# Altium PCB SatController.PcbDoc
Units mil, origin at the board's own origin, x right, y up, seen from the top; angles counter-clockwise.
Board outline 2000 x 1700 mil, 2 copper layers (Top Layer, Bottom Layer); 25 components, 25 nets, 117 pads, 12 vias.
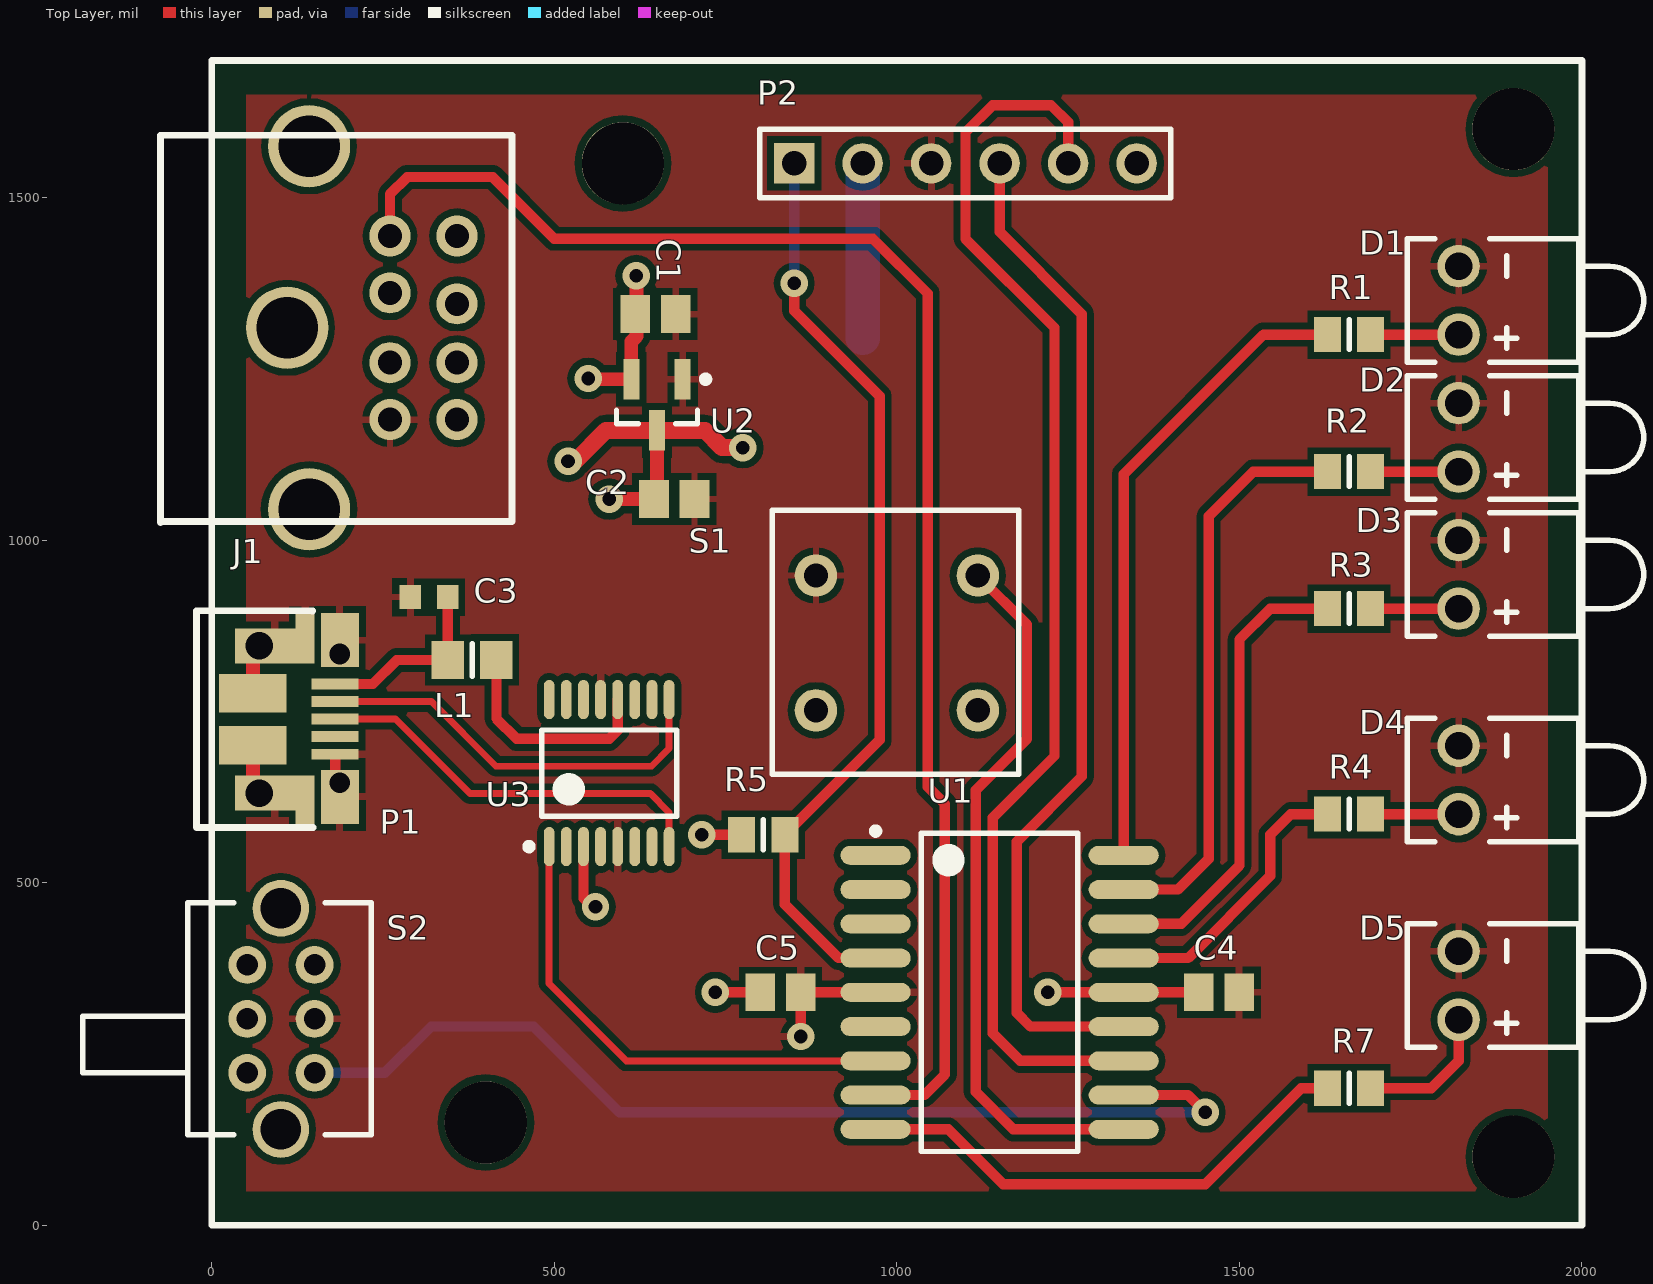
[diagram p0: Top Layer view]
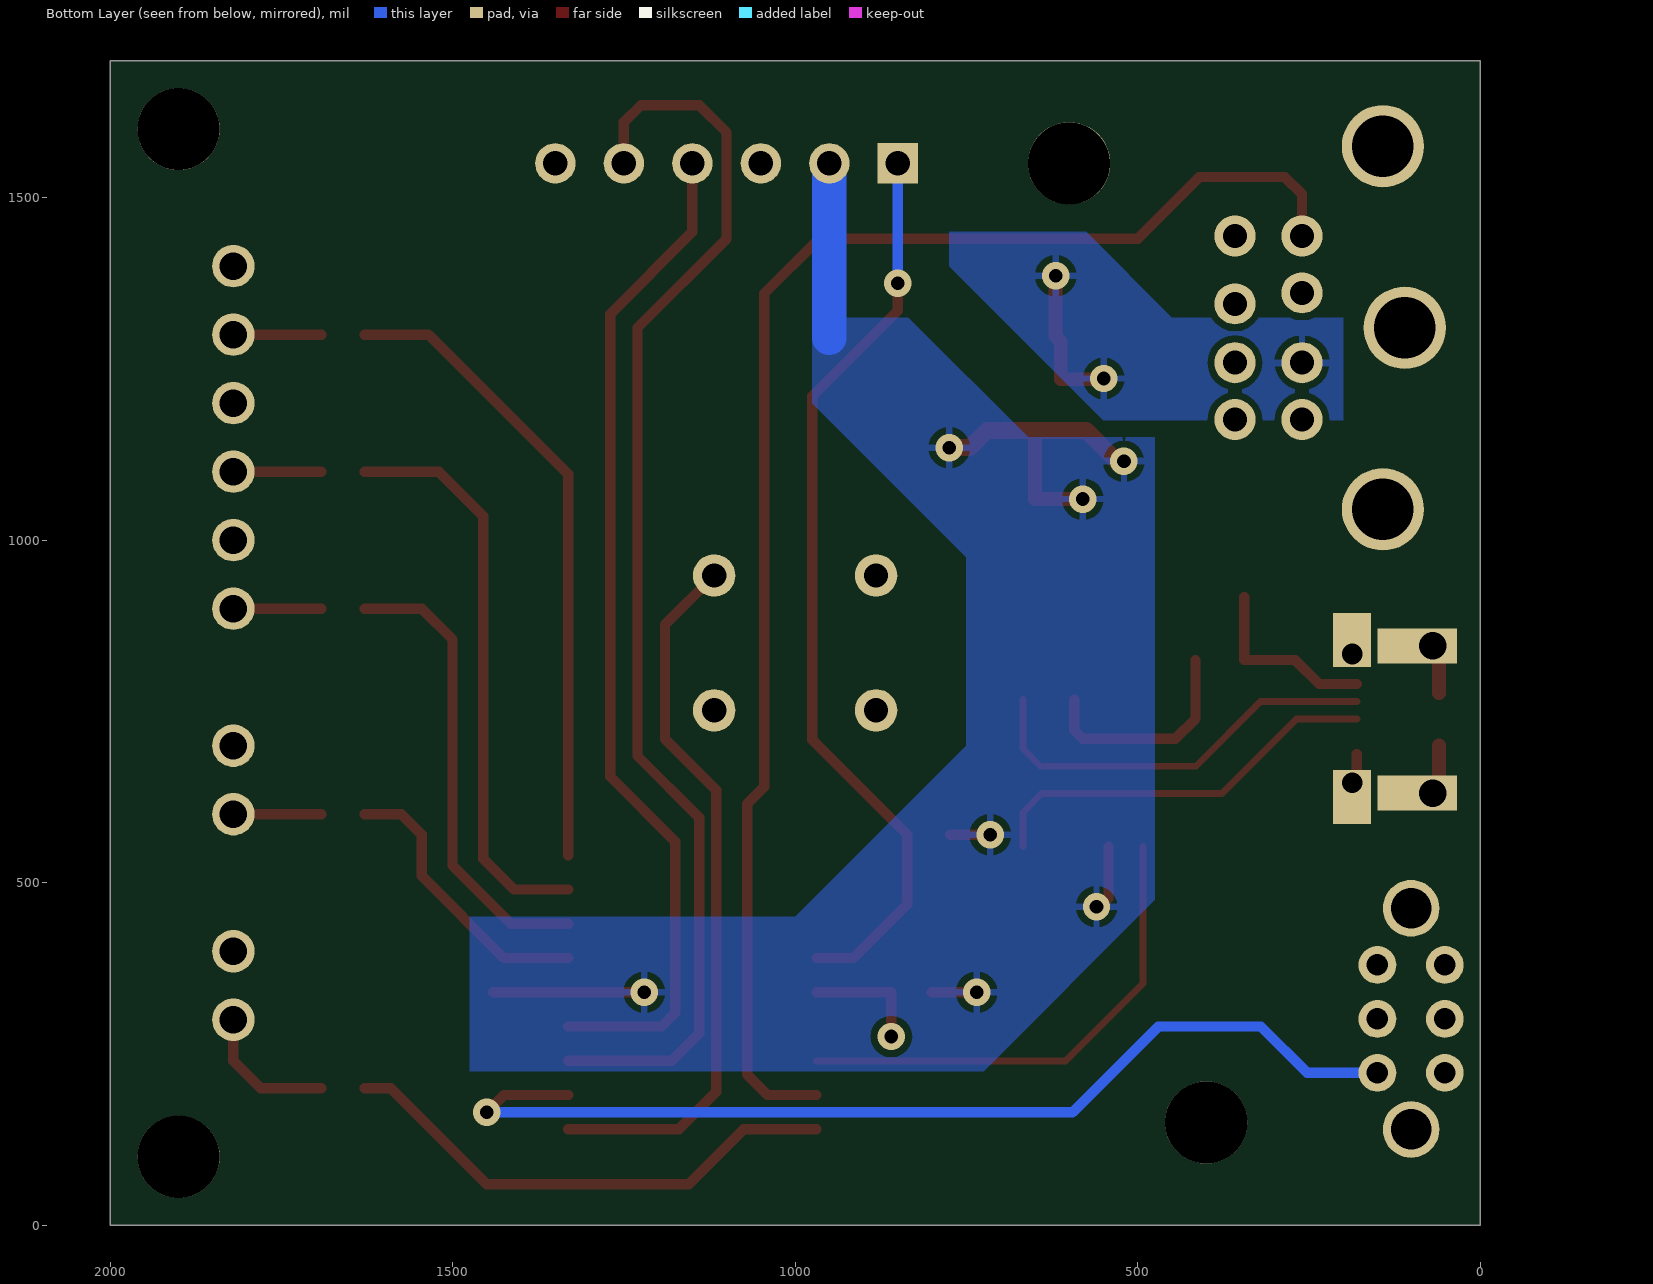
[diagram p1: Bottom Layer view, seen from below]

## Layer stack, top to bottom
Top Solder: solder mask 0.4, Solder Resist, Dk 3.5
Top Layer: signal copper 1.4
Dielectric 1: dielectric 12.6, FR-4, Dk 4.8
Bottom Layer: signal copper 1.4
Bottom Solder: solder mask 0.4, Solder Resist, Dk 3.5

## Board outline
0,0 0,1700 2000,1700 2000,0

## Design rules (kind name [scope] priority, off if disabled: settings)
Clearance [All] p1: gap=10
PolygonConnect PolygonConnect_1 [All vs IsNamedPolygon('Top Layer-No Net')] p1: connectstyle=Relief reliefconductorwidth=15 reliefentries=4 polygonreliefangle="90 Angle" airgapwidth=10
PolygonConnect [All] p2: connectstyle=Relief reliefconductorwidth=10 reliefentries=4 polygonreliefangle="90 Angle" airgapwidth=10
RoutingVias [All] p1: holewidth=20 width=40 viastyle="Through Hole" minholewidth=12 minwidth=20 maxholewidth=28 maxwidth=50
SolderMaskExpansion [All] p1: expansion=4
Width [All] p1: maxlimit=50 minlimit=10 preferedwidth=10 minimp=50.000000 maximp=50.000000 favimp=50.000000
30 further rules are at their usual default settings.

## Components (designator, comment, footprint, x,y, rotation, side; value= is the part's Value field where it differs from the comment)
C1 "1.0 uF" CAPC2012L 647.44,1330 r180 top
C2 "Value" CAPC2012L 675,1060 r180 top
C3 "10 nF" CAPC1608L 317,917 r0 top
C4 "0.1uF" CAPC2012L 1470,340 r0 top
C5 "0.1uF" CAPC2012L 830,340 r180 top
D1 "LED" LTL-4231HNBP 1820,1300 r90 top
D2 "LED" LTL-4231HNBP 1820,1100 r90 top
D3 "LED" LTL-4231HNBP 1820,900 r90 top
D4 "LED" LTL-4231HNBP 1820,600 r90 top
D5 "LED" LTL-4231HNBP 1820,300 r90 top
J1 "8-Pin_DIN" MD-80SM -75,1310 r90 top
L1 "Inductor" 6-0805_N 380,825 r0 top
P1 "Micro USB" "Connector, Micro-USB, 5-pin - prototype" 180,790 r270 top
P2 "Header 6" HDR1X6 850,1550 r0 top
R1 "Value" RESC2012L 1660,1300 r180 top
R2 "Value" RESC2012L 1660,1100 r180 top
R3 "Value" RESC2012L 1660,900 r180 top
R4 "Value" RESC2012L 1660,600 r180 top
R5 "Value" RESC2012L 805,570 r0 top
R7 "Value" RESC2012L 1660,200 r0 top
S1 "PVA-KeySwitch" PVA1_Switch 1000,850 r180 top
S2 "slide_switch" OS202011MA0QN1 150,380 r270 top
U1 "PIC16LF1827" SOIC127P1030-18M 1150,340 r0 top
U2 "MCP1702T" SOT23-3N 649.84,1197.6 r270 top
U3 "FT230X" SOP64P600X175-16N 580,660 r90 top

## Footprints (in the part's own frame and the unit in brackets; to place one, negate y for a bottom-side part, rotate by r counter-clockwise, add the part's x,y. Pads: shape width x height; smd on the part's side, far side on the other; paste and mask are expansions set on the pad)
6-0805_N [mm] "Chip Resistor, Body 2.0x1.2mm, IPC Medium Density"
  rect 1.2x1.4 smd: 1(-0.9,0) 2(0.9,0)
  silkscreen extent 0,-0.6 0,0.6, body extent -1.07,-0.7 1.07,0.7, height 0.7
CAPC1608L [mm] "Chip Capacitor, Body 1.6x0.8mm, IPC High Density"
  rect 0.8x0.9 smd: 1(-0.7,0) 2(0.7,0)
  body extent -0.87,-0.48 0.87,0.48, height 0.85
CAPC2012L [mm] "Chip Capacitor, Body 2.0x1.3mm, IPC High Density"
  rect 1.1x1.4 smd: 1(-0.75,0) 2(0.75,0)
  body extent -1.1,-0.72 1.1,0.72, height 1.1
"Connector, Micro-USB, 5-pin - prototype" [mm] "Micro-USB B-Type Recep, 10103594"
  rect 0.4x1.75 smd mask+0.102: 1(0,0) 2(0.65,0) 3(1.3,0) 4(1.95,0) 5(2.6,0)
  rect 1.3x2.95 hole 1.016 unplated copper offset 0,0.584 mask+0.102: 6(-1.418,-2.819) 6(4.043,-2.819)
  rect 2x1.4 hole 0.762 unplated copper offset -0.52,0 mask+0.102: 6(-1.113,0.178)
  rect 1.425x2.5 smd mask+0.102: 6(0.335,-3.048) 6(2.265,-3.048)
  rect 2x1.4 hole 0.762 unplated copper offset 0.52,0 mask+0.102: 6(3.662,0.178)
  rect 1.3x0.7 smd mask+0.102: 9(4.538,-1.11) 10(-1.977,-1.11)
  silkscreen extent -2.72,-5.14 5.32,-0.81, body extent -2.71,-5.66 5.33,0.37, height 2.86
HDR1X6 [mm] "Connector; Header; 6 Position"
  rect 1.5x1.5 hole 0.9: 1(0,0)
  round 1.5 hole 0.9: 2(2.54,0) 3(5.08,0) 4(7.62,0) 5(10.16,0) 6(12.7,0)
  silkscreen extent -1.27,-1.27 13.97,1.27
LTL-4231HNBP [mil] "RA 3MM LED"
  round 62 hole 40: 1(0,0) 2(100,0)
  silkscreen extent -40,-270 140,75, body extent -40,-268 141,76, height 287
MD-80SM [mil] "8-Pin DIN"
  round 60 hole 35: 1(-51,-335) 2(51,-335) 3(-134,-335) 4(-51,-433) 5(134,-335) 6(-134,-433) 7(35,-433) 8(134,-433)
  round 120 hole 90: M1(0,-185) M2(-265,-217) M3(265,-217)
  silkscreen extent -284,-513 281,0, body extent -283,-512 281,0, height 504
OS202011MA0QN1 [mm]
  round 2.1 hole 1.5: 0(-2.1,-1.25) 0(6.1,-1.25)
  round 1.4 hole 0.8: 1(0,0) 2(2,0) 3(4,0) 4(0,-2.5) 5(2,-2.5) 6(4,-2.5)
  silkscreen extent -2.3,-8.6 6.3,2.1, body extent -2.3,-8.65 6.3,2.15, height 4.71
PVA1_Switch [mm] "Key Switch"
  round 1.575 hole 0.9: 11(-3,-2.5) 12(3,-2.5) 21(-3,2.5) 22(3,2.5)
  silkscreen extent -4.52,-4.91 4.62,4.87, body extent -4.6,-4.9 4.6,4.9, height 20.54
RESC2012L [mm] "Chip Resistor, Body 2.0x1.3mm, IPC High Density"
  rect 1x1.3 smd: 1(-0.8,0) 2(0.8,0)
  silkscreen extent 0,-0.55 0,0.55, body extent -1.07,-0.7 1.07,0.7, height 0.65
SOIC127P1030-18M [mm] "SOIC, 18-Leads, Body 11.6x7.5mm, Pitch 1.27mm, IPC Low Density"
  oval 2.6x0.7 smd: 1(-4.6,5.08) 2(-4.6,3.81) 3(-4.6,2.54) 4(-4.6,1.27) 5(-4.6,0) 6(-4.6,-1.27) 7(-4.6,-2.54) 8(-4.6,-3.81) 9(-4.6,-5.08) 10(4.6,-5.08) 11(4.6,-3.81) 12(4.6,-2.54) 13(4.6,-1.27) 14(4.6,0) 15(4.6,1.27) 16(4.6,2.54) 17(4.6,3.81) 18(4.6,5.08)
  silkscreen extent -4.72,-5.9 2.9,6.1, body extent -5.18,-5.77 5.12,5.77, height 2.65
SOP64P600X175-16N [mm] "SOP, 16-Leads, Body 4.90x3.90mm, Pitch 0.64mm, IPC Medium Density"
  oval 1.45x0.4 smd: 1(-2.725,2.222) 2(-2.725,1.587) 3(-2.725,0.952) 4(-2.725,0.317) 5(-2.725,-0.318) 6(-2.725,-0.953) 7(-2.725,-1.588) 8(-2.725,-2.222) 9(2.725,-2.222) 10(2.725,-1.587) 11(2.725,-0.952) 12(2.725,-0.317) 13(2.725,0.318) 14(2.725,0.953) 15(2.725,1.588) 16(2.725,2.222)
  silkscreen extent -2.85,-2.5 1.6,3.1, body extent -3,-2.5 3,2.5, height 1.75
SOT23-3N [mm] "SOT23, 3-Leads, Body 2.9x1.3mm, Pitch 0.95mm, Lead Span 2.5mm, IPC Medium Density"
  rect 1.5x0.6 smd: 1(-0.95,0.95) 2(-0.95,-0.95) 3(0.95,0)
  silkscreen extent -1.07,-1.5 0.7,1.93, body extent -1.37,-1.45 1.43,1.45, height 1.3

## Part data
C1 C2 C4 C5: library part "Cap Semi"
C3: library part "Cap Semi", "CAP CER 1UF 6.3V 10% X5R 0603"
D1 D2 D3 D4 D5: library part LED3mm-ra, "SMD LED"
P2: "Header, 6-Pin"
R1 R2 R3 R4 R5 R7: library part R, "RES 120 OHM 1/10W 1% 0402 SMD"

## Free pads (board coordinates)
  round 120 hole 120: 0(600,1550) 1(400,150) 2(1900,100) 3(1900,1600)

## Via types
v1: diameter 40, hole 20, Top Layer to Bottom Layer, 12 vias

## Nets (pads, with @x,y where several pads share a name; then routed paths per layer and width w, separated by ;. In a path a pad name is that pad's centre, name@x,y a point inside that pad or via, vN(x,y) a via of type N, cw(c..) or ccw(c..) an arc to the next point about the centre after c; other vN are vias at no path point)
3V3: C2.2 C4.1 C5.2 P2.2 R5.1 U1.14 U2.3 U3.3 | length 1151.5
  Top Layer w15: U3.3 542.5,477.5 555,465 v1(560,465) ; v1(580,1060) 590,1060 v1@590.04,1060.04 ; v1(715,570) R5.1 ; v1(735,340) C5.2 ; v1(1220,340) C4.1
  Top Layer w20: v1@590.04,1060.04 649.84,1060.04 U2.3
  Top Layer w25: v1(520,1115) 530,1115 575.2,1160.2 U2.3 719.8,1160.2 745,1135 v1(775,1135)
  Bottom Layer w50: 950,1295 P2.2
13V8: C1.2 J1.1 U2.2 | length 217.7
  Top Layer w20: v1(549.44,1236) 550.44,1235 U2.2 612.44,1290 619.88,1297.44 619.88,1330 619.88,1385.56 v1(619.44,1386)
DATA: R3.2 U1.16 | length 681.2
  Top Layer w15: U1.16 1415,440 1500,525 1500,855 1545,900 R3.2
GND: C1.1 C2.1 C3.1 C4.2 C5.1 D1.2 D2.2 D3.2 D4.2 D5.2 J1.3 P1.5 P1.6 P1.9 P1.10 P2.3 S1.12 S2.2 U1.5 U2.1 U3.5 U3.13 | length 365.1
  Top Layer w15: P1.6@180,652.82 P1.5 ; v1(859.53,275.47) C5.1 U1.5
  Top Layer w20: P1.6@60,700.82 60,639.82 P1.6@69,630.82 ; P1.6@60,776.82 60,836.82 P1.6@69,845.82 ; P1.6@180,652.82 P1.6@187,645.82
ICSPCLK: P2.5 U1.12 | length 1850.7
  Top Layer w15: P2.5 1250,1610 1225,1635 1140,1635 1100,1595 1100,1440 1230,1310 1230,685 1140,595 1140,280 1180,240 U1.12
ICSPDAT: P2.4 U1.13 | length 1493.4
  Top Layer w15: P2.4 1150,1450 1270,1330 1270,655 1175,560 1175,310 1195,290 U1.13
MCLR: P2.1 R5.2 U1.4 | length 1355.6
  Top Layer w15: v1(850,1375) 850,1335 975,1210 975,708.5 R5.2 836.5,468.5 915,390 U1.4
  Bottom Layer w15: v1(850,1375) P2.1
NetC3_2: C3.2 L1.1 P1.1 | length 271.1
  Top Layer w15: P1.1 235,790 270,825 L1.1 C3.2
NetD1_1: D1.1 R1.1 | length 128.5
  Top Layer w15: R1.1 D1.1
NetD2_1: D2.1 R2.1 | length 128.5
  Top Layer w15: R2.1 D2.1
NetD3_1: D3.1 R3.1 | length 128.5
  Top Layer w15: R3.1 D3.1
NetD4_1: D4.1 R4.1 | length 128.5
  Top Layer w15: R4.1 D4.1
NetD5_1: D5.1 R7.2 | length 205.1
  Top Layer w15: R7.2 1780,200 1820,240 D5.1
NetL1_2: L1.2 U3.12 | length 324.7
  Top Layer w15: L1.2 415.43,739.57 445,710 580,710 592.5,722.5 U3.12
NetP1_2: P1.2 U3.9 | length 608.7
  Top Layer w10: P1.2 320.59,764.41 415,670 641.63,670 667.5,695.87 U3.9
NetP1_3: P1.3 U3.8 | length 593.7
  Top Layer w10: P1.3 268.09,738.82 376.91,630 640,630 667.5,602.5 U3.8
NetR7_1: R7.1 U1.9 | length 750.7
  Top Layer w15: U1.9 1075,140 1155,60 1450,60 1590,200 R7.1
NetS1_11: S1.11 U1.10 | length 1053.2
  Top Layer w15: S1.11 1190,876.54 1190,710 1115,635 1115,195 1170,140 U1.10
NetS2_3: S2.3 U1.11 | length 1509
  Top Layer w15: U1.11 1425,190 v1(1450,165)
  Bottom Layer w15: S2.3 252.52,222.52 320,290 470,290 595,165 v1(1450,165)
NetU1_7: U1.7 U3.1 | length 723.4
  Top Layer w10: U3.1@492.13,552.72 492.13,352.87 605,240 U1.7
PTT: R4.2 U1.15 | length 419.5
  Top Layer w15: U1.15 1425,390 1545,510 1545,570 1575,600 R4.2
RXD: J1.5 U1.8 | length 2190.7
  Top Layer w15: J1.5 260,1505 285,1530 410,1530 500,1440 965,1440 1045,1360 1045,640 1070,615 1070,220 1040,190 U1.8
TXD: J1.4
UV: R1.2 U1.18 | length 938
  Top Layer w15: U1.18 1331.1,1096.1 1535,1300 R1.2
VU: R2.2 U1.17 | length 843
  Top Layer w15: U1.17 1410,490 1455,535 1455,1035 1520,1100 R2.2
pads on no net: J1.2 J1.6 J1.7 J1.8 J1.M1 J1.M2 J1.M3 P1.4 P2.6 S1.21 S1.22 S2.0 S2.1 S2.4 S2.5 S2.6 U1.1 U1.2 U1.3 U1.6 U3.2 U3.4 U3.6 U3.7 U3.10 U3.11 U3.14 U3.15 U3.16

## Polygon pours and split planes (outlines as drawn)
13V8 on Bottom Layer "BOT Layer-13v8" (solid, pour order 2): 200,1325 450,1325 575,1450 775,1450 775,1400 550,1175 200,1175 200,1325
3V3 on Bottom Layer "BOT Layer-3v3" (solid, pour order 0): 975,1325 975,1200 750,975 750,700 850,600 1000,450 1475,450 1475,225 725,225 475,475 475,1050 475,1150 660,1150 835,1325
GND on Top Layer "TOP Layer-GND" (solid, pour order 4): 50,1650 1950,1650 1950,50 50,50 50,1650

## Silkscreen, mask and mechanical layers (free items; w line width, h text height)
Top Overlay:
  the board outline again, w10